# Altium PCB ShieldCerveaux.PCBDOC
Units mm, origin at the board's own origin, x right, y up, seen from the top; angles counter-clockwise.
Board outline 299.72 x 199.9 mm, 2 copper layers (Top Layer, Bottom Layer); 60 components, 39 nets, 263 pads, 60 vias.
Unrouted connection lines stored in the file: 1.
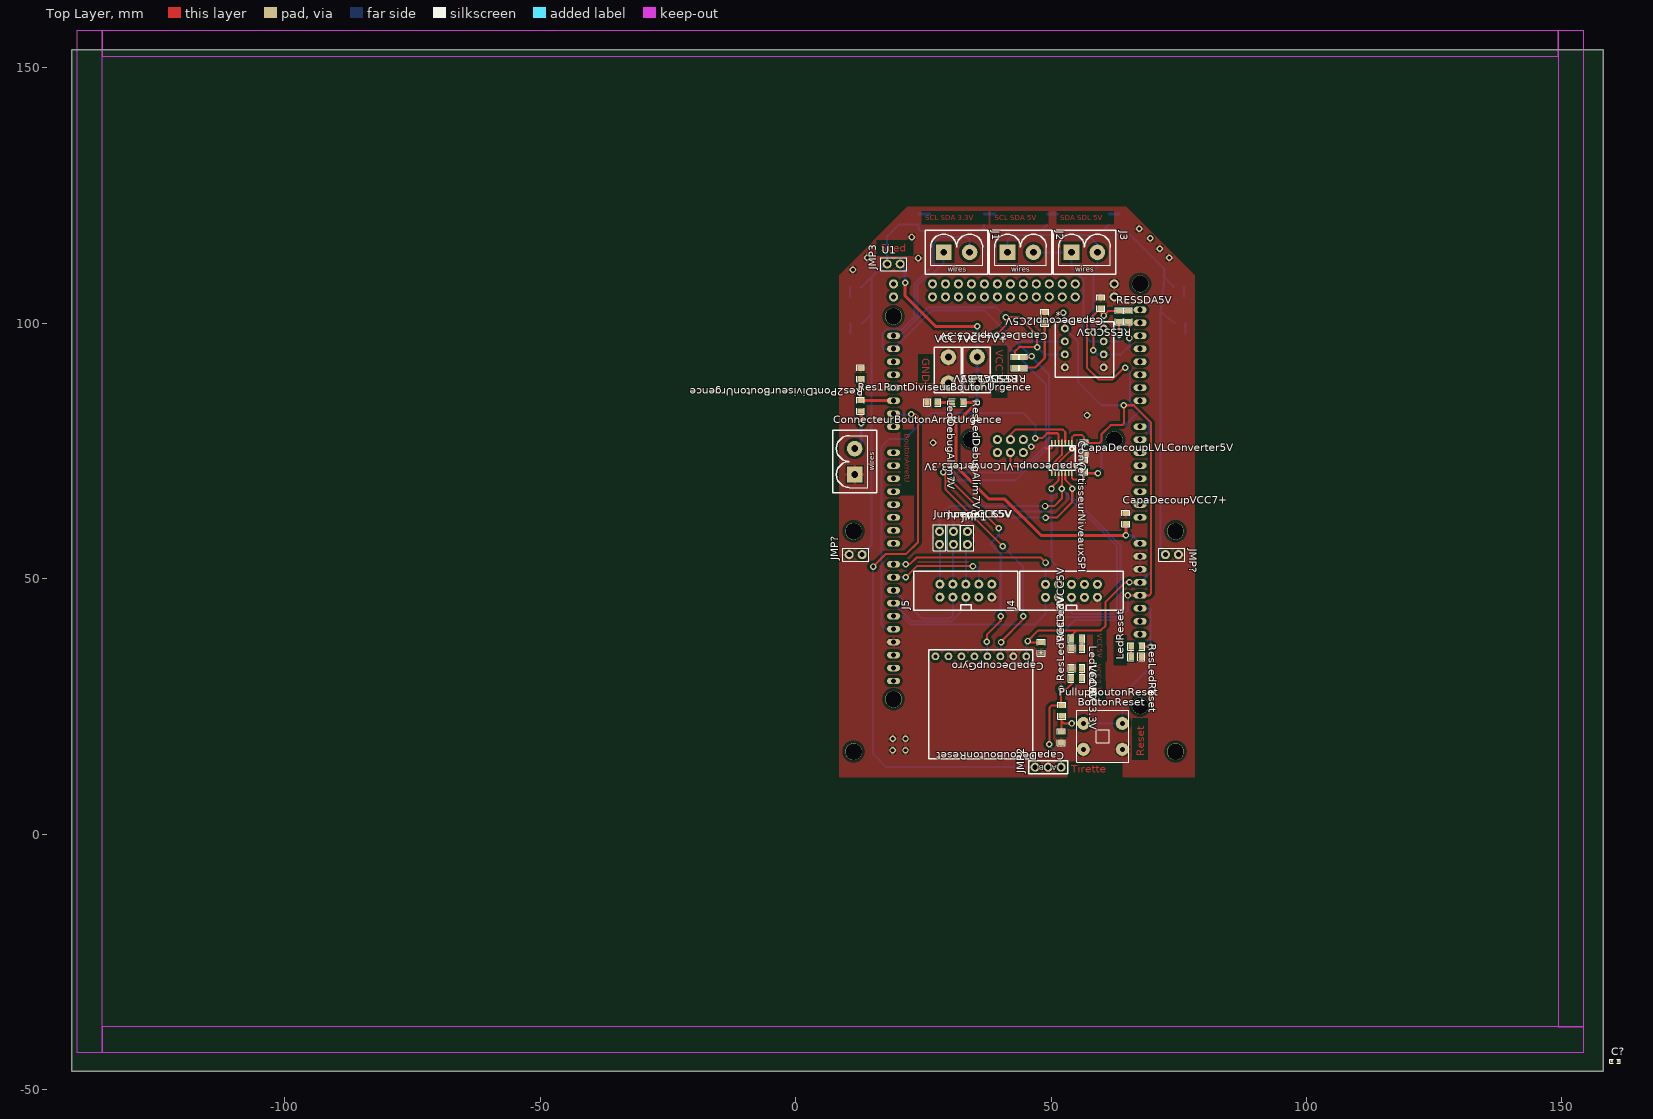
[diagram p0: Top Layer view]
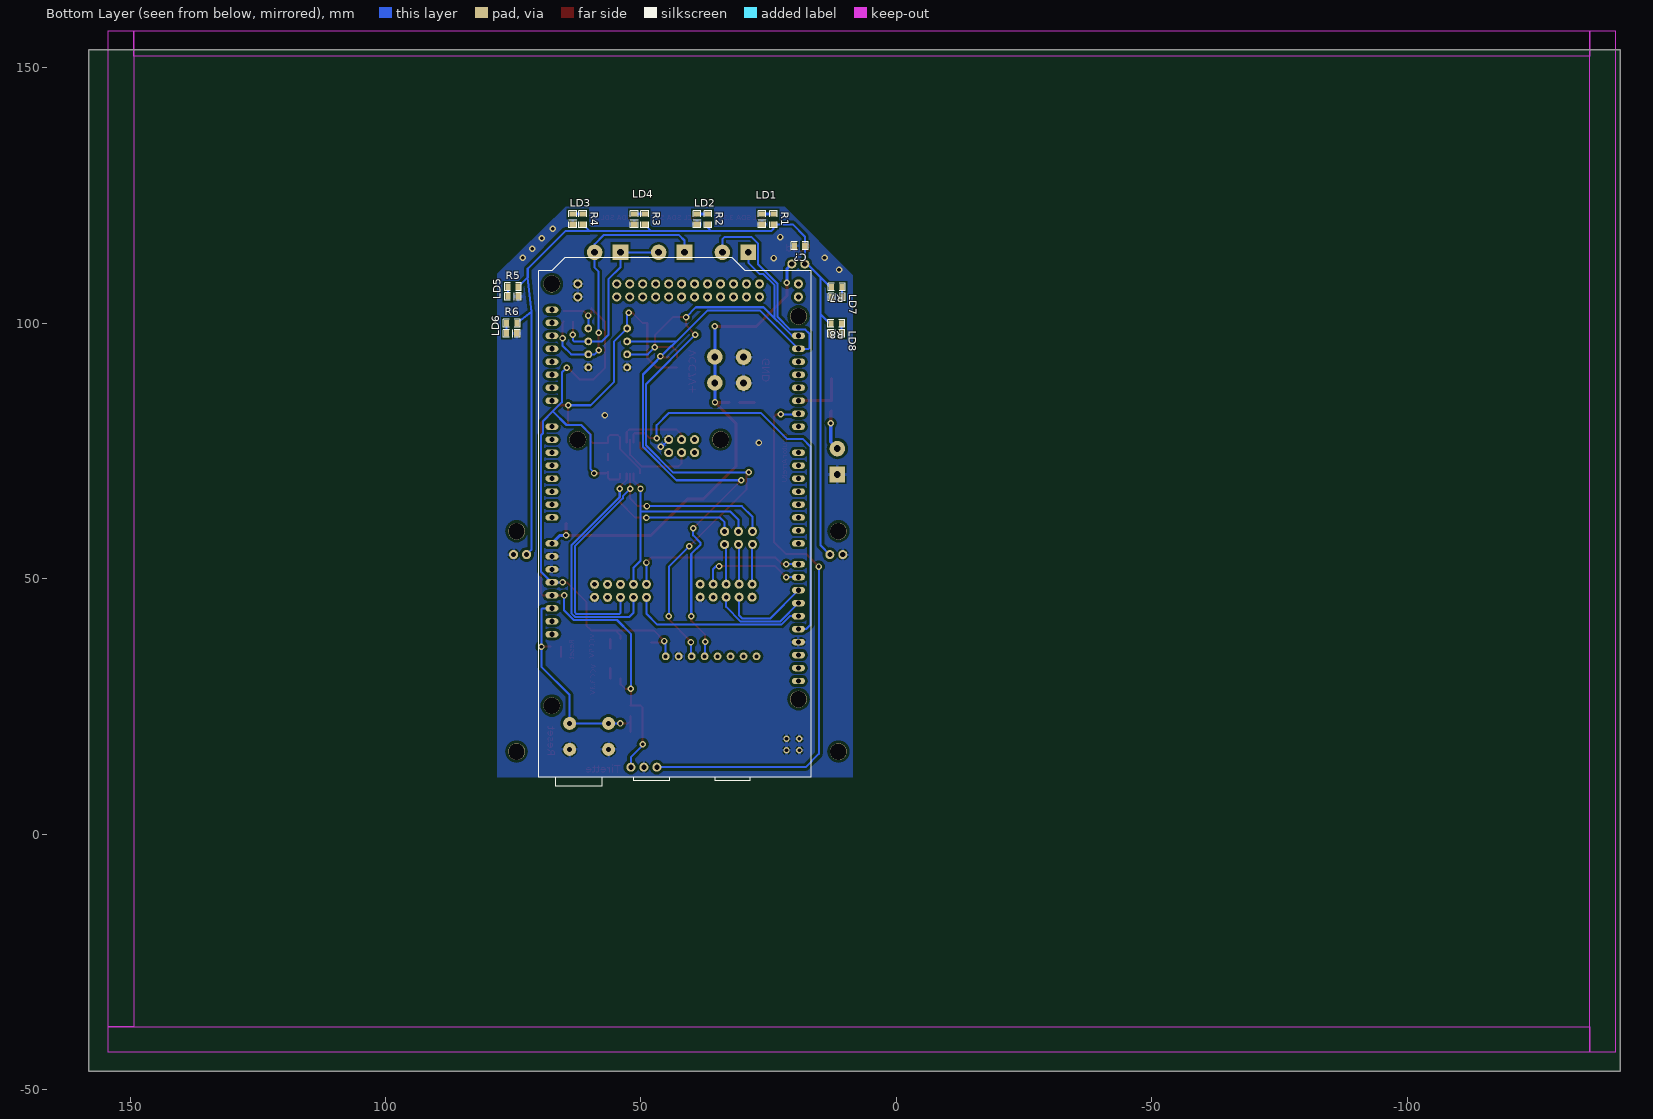
[diagram p1: Bottom Layer view, seen from below]

## Layer stack, top to bottom
Top Solder: solder mask 0.0102, Solder Resist, Dk 3.5
Top Layer: signal copper 0.0356
Dielectric1: dielectric 0.32, FR-4, Dk 4.8
Bottom Layer: signal copper 0.0356
Bottom Solder: solder mask 0.0102, Solder Resist, Dk 3.5

## Board outline
-141.655,-46.39 158.065,-46.39 158.065,153.508 -141.655,153.508

## Design rules (kind name [scope] priority, off if disabled: settings)
Clearance Clearance_bottom_polygon [OnLayer('Bottom Layer') Or OnLayer('Multi-Layer') vs OnLayer('Bottom Layer')  And  InPoly] p1: gap=0.508
Clearance Clearance_top_polygon [OnLayer('Top Layer')  Or OnLayer('Multi-Layer') vs OnLayer('Top Layer') And InPoly] p2: gap=0.508
Clearance Clearance_bottom [OnLayer('Bottom Layer') Or OnLayer('Multi-Layer') vs OnLayer('Bottom Layer')  And Not InPoly] p3: gap=0.203
Clearance Clearance_top [OnLayer('Top Layer')  Or OnLayer('Multi-Layer') vs OnLayer('Top Layer') And Not InPoly] p4: gap=0.203
Clearance Clearance_pad_to_pad [OnLayer('Multi-Layer') vs OnLayer('Multi-Layer')] p5: gap=0.254
ComponentClearance ComponentClearance_bottom [OnLayer('Bottom Overlay') vs OnLayer('Bottom Overlay')] p1: gap=0 collisioncheckmode=3 verticalgap=0.254 showdistances=FALSE
ComponentClearance ComponentClearance_top [OnLayer('Top Overlay') vs OnLayer('Top Overlay')] p2: gap=0 collisioncheckmode=3 verticalgap=0.254 showdistances=FALSE
FabricationTestPointUsage TestPointUsage [All] p1: valid=0 allowmultiple=FALSE
FabricationTestpoint Testpoint [All] p1: side=3 testpointundercomponent=TRUE minsize=1.016 maxsize=2.54 preferedsize=1.524 minholesize=0 maxholesize=1.016 preferedholesize=0.813 testpointgrid=0.025 allowsidetop=TRUE allowsidebottom=TRUE usegrid=TRUE gridtolerance=0
HoleSize [All] p1: absolutevalues=TRUE maxlimit=25.4 minlimit=0.406 maxpercent=80.000 minpercent=20.000
MinimumAnnularRing [PadXSize_AllLayers = PadYSize_AllLayers] p1: minimumring=0.254
PermittedLayers [All] p1: toplayerpermitted=TRUE bottomlayerpermitted=TRUE
PolygonConnect [All] p1: connectstyle=Relief reliefconductorwidth=0.61 reliefentries=4 polygonreliefangle="90 Angle" airgapwidth=0.254
RoutingVias [All] p1: holewidth=0.406 width=0.813 viastyle="Through Hole" minholewidth=0.4 minwidth=0.8 maxholewidth=0.6 maxwidth=10
SMDToPlane [All] p1: distance=0
SolderMaskExpansion [All] p1: expansion=0.102
ViasUnderSMD [All] p1: allowed=FALSE
Width Width_botom_top [OnLayer('Bottom Layer') or OnLayer('Top Layer')] p1: maxlimit=254 minlimit=0.254 preferedwidth=0.813 minimp=50.000000 maximp=50.000000 favimp=50.000000
26 further rules are at their usual default settings.

## Classes and differential pairs
component class ShematicShieldCerveau: * BoutonReset CapaDecouBoutonReset CapaDecoupGyro CapaDecoupI2C3.3V CapaDecoupI2C5V CapaDecoupLVLConverter3.3V CapaDecoupLVLConverter5V CapaDecoupVCC7+ ConnecteurBoutonArretUrgence ConvertisseurNiveauxSPI J1 J2 J3 J4 J5 JMP1 JMP2 JMP? JumperCS5V JumperSCLK5V LedDebugAlim7V LedReset LedVCC3.3V LedVCC5V PullupBoutonReset Res1PontDiviseurBoutonUrgence Res2PontDiviseurBoutonUrgence ResLedDebugAlim7V ResLedReset ResLedVCC3.3V ResLedVCC5V RESSCL3.3V RESSCL5V RESSDA3.3V RESSDA5V U1 VCC7V+ VCC7V-
component class Led: C? JMP3 LD1 LD2 LD3 LD4 LD5 LD6 LD7 LD8 R1 R2 R3 R4 R5 R6 R7 R8

## Components (designator, comment, footprint, x,y, rotation, side; value= is the part's Value field where it differs from the comment)
* "ConvertisseurDeNiveau" ConvertisseurDeniveauxI2C 52.705,98.984 r0 top
* "GyroscopeI2C" GyroscopeI2C 45.161,34.798 r270 top
BoutonReset "SW_PB" KSA 56.337,16.586 r90 top
C? "CAP" 0402 159.741,-44.434 r0 top
C? "CAP" 0805 17.932,115.138 r0 bottom
CapaDecouBoutonReset "CAP" 0805 52.019,20.015 r270 top
CapaDecoupGyro "CAP" 0805 48.057,37.516 r270 top
CapaDecoupI2C3.3V "CAP" 0805 48.768,102.108 r270 top
CapaDecoupI2C5V "CAP" 0805 59.715,104.978 r270 top
CapaDecoupLVLConverter3.3V "CAP" 0805 56.49,76.556 r270 top
CapaDecoupLVLConverter5V "CAP" 0805 56.439,71.018 r90 top
CapaDecoupVCC7+ "CAP" 0805 64.618,60.757 r90 top
ConnecteurBoutonArretUrgence "comment" AMP_2 11.557,70.383 r90 top
ConvertisseurNiveauxSPI "LvlConverter_Adg3304" LvlConverter_Adg3304 54.077,76.683 r270 top
J1 "I2CConntector=>MotorDue" AMP_2 28.981,113.868 r0 top
J2 "conntectorI2C=>ShieldRAMP" AMP_2 41.478,113.868 r0 top
J3 "conntectorI2C=>Sensor" AMP_2 54,113.868 r0 top
J4 "ConnectorDisplay" HE10-10V 48.92,46.355 r90 top
J5 "ConnectorEncoder" HE10-10V 28.245,46.38 r90 top
JMP1 "JUMPER2" JMP2-100 33.63,56.693 r90 top
JMP2 "JUMPER3" JMP3-100 51.968,13.106 r180 top
JMP3 "JUMPER2" JMP2-100 20.472,111.582 r180 top
JMP? "JUMPER2" JMP2-100 13.03,54.712 r180 top
JMP? "JUMPER2" JMP2-100 72.39,54.712 r0 top
JumperCS5V "JUMPER2" JMP2-100 30.912,56.718 r90 top
JumperSCLK5V "JUMPER2" JMP2-100 28.169,56.718 r90 top
LD1 "comment" LED0805 26.314,119.355 r90 bottom
LD2 "comment" LED0805 39.04,119.355 r90 bottom
LD3 "comment" LED0805 63.348,119.355 r90 bottom
LD4 "comment" LED0805 51.308,119.355 r90 bottom
LD5 "comment" LED0805 74.016,105.232 r0 bottom
LD6 "comment" LED0805 74.295,97.993 r0 bottom
LD7 "comment" LED0805 12.725,105.131 r180 bottom
LD8 "comment" LED0805 12.776,97.993 r180 bottom
LedDebugAlim7V "comment" LED0805 25.705,84.48 r0 top
LedReset "comment" LED0805 67.716,34.722 r180 top
LedVCC3.3V "comment" LED0805 53.975,32.487 r0 top
LedVCC5V "comment" LED0805 53.975,36.347 r0 top
PullupBoutonReset "RES" 0805 52.07,23.165 r90 top
R1 "RES" 0805 24.054,121.387 r270 bottom
R2 "RES" 0805 36.881,121.387 r270 bottom
R3 "RES" 0805 49.276,121.387 r270 bottom
R4 "RES" 0805 61.366,121.387 r270 bottom
R5 "RES" 0805 76.048,107.112 r180 bottom
R6 "RES" 0805 76.302,100 r180 bottom
R7 "RES" 0805 10.668,107.086 r0 bottom
R8 "RES" 0805 10.744,99.924 r0 bottom
Res1PontDiviseurBoutonUrgence "RES" 0805 12.725,82.829 r90 top
Res2PontDiviseurBoutonUrgence "RES" 0805 12.725,91.186 r270 top
ResLedDebugAlim7V "RES" 0805 30.709,84.48 r0 top
ResLedReset "RES" 0805 65.684,36.728 r0 top
ResLedVCC3.3V "RES" 0805 56.007,30.505 r180 top
ResLedVCC5V "RES" 0805 56.007,38.227 r180 top
RESSCL3.3V "RES" 0805 42.951,93.32 r270 top
RESSCL5V "RES" 0805 65.126,102.362 r270 top
RESSDA3.3V "RES" 0805 44.602,93.32 r270 top
RESSDA5V "RES" 0805 63.322,100.33 r90 top
U1 "ARDUINO_DUE" ARDUINO_DUE 69.977,11.176 r90 top
VCC7V+ "Connector_Cosse" Connector_Cosse 35.535,93.396 r0 top
VCC7V- "Connector_Cosse" Connector_Cosse 29.921,93.37 r0 top

## Footprints (in the part's own frame and the unit in brackets; to place one, negate y for a bottom-side part, rotate by r counter-clockwise, add the part's x,y. Pads: shape width x height; smd on the part's side, far side on the other; paste and mask are expansions set on the pad)
0402 [mil]
  rect 20x20 smd: 1(0,0) 2(51.18,0)
  silkscreen extent -15,-15 65,15
0805 [mil]
  rect 40x50 smd: 1(0,0) 2(80,0)
  silkscreen extent -25,-30 105,30
AMP_2 [mil]
  rect 120x120 hole 52: 1(0,0)
  round 120 hole 52: 2(200,0)
  silkscreen extent -140,-170 340,170
ARDUINO_DUE [mil]
  oval 50x100 hole 40: 1(740,2000) 2(840,2000) 3(940,2000) 4(1040,2000) 5(1140,2000) 6(1240,2000) 7(1340,2000) 8(1440,2000) 9(1540,2000) 10(1640,2000) 11(1800,2000) 12(1900,2000) 13(2000,2000) 14(2100,2000) 15(2200,2000) 16(2300,2000) 17(2400,2000) 18(2500,2000) 19(2700,2000) 20(2800,2000) 21(2900,2000) 22(3000,2000) 23(3100,2000) 24(3200,2000) 25(3300,2000) 26(3400,2000) 63(3600,100) 64(3500,100) 65(3400,100) 66(3300,100) 67(3200,100) 68(3100,100) 69(3000,100) 70(2900,100) 71(2700,100) 72(2600,100) 73(2500,100) 74(2400,100) 75(2300,100) 76(2200,100) 77(2100,100) 78(2000,100) 79(1800,100) 80(1700,100) 81(1600,100) 82(1500,100) 83(1400,100) 84(1300,100) 85(1200,100) 86(1100,100)
  round 70 hole 40: 27(3700,2000) 28(3800,2000) 33(3700,1700) 34(3800,1700) 35(3700,1600) 36(3800,1600) 37(3700,1500) 38(3800,1500) 39(3700,1400) 40(3800,1400) 41(3700,1300) 42(3800,1300) 43(3700,1200) 44(3800,1200) 45(3700,1100) 46(3800,1100) 47(3700,1000) 48(3800,1000) 49(3700,900) 50(3800,900) 51(3700,800) 52(3800,800) 53(3700,700) 54(3800,700) 55(3700,600) 56(3800,600) 61(3700,300) 62(3800,300) 87(2500,1200) 88(2600,1200) 89(2500,1100) 90(2600,1100) 91(2500,1000) 92(2600,1000)
  round 0 all layers, no hole: 29(3700,1900) 30(3800,1900) 31(3700,1800) 32(3800,1800) 57(3700,500) 58(3800,500) 59(3700,400) 60(3800,400)
  round 130 hole 126: ""(550,100) ""(600,2000) ""(2600,300) ""(2600,1400) ""(3550,2000) ""(3800,100)
Connector_Cosse [mil]
  round 120 hole 52.01: 1(0,-200) 1(0,0)
  silkscreen extent -110,-275 100,75
ConvertisseurDeniveauxI2C [mil]
  round 60 hole 30: 1(0,0) 2(0,-100) 3(0,-200) 4(0,-300) 5(299.21,-300) 6(299.21,-200) 7(299.21,-100) 8(299.21,0)
  silkscreen extent -75,-375 375,50
GyroscopeI2C [mil]
  round 60 hole 30: 1(0,0) 2(0,-100) 3(0,-200) 4(0,-300) 5(0,-400) 6(0,-500) 7(0,-600) 8(0,-700)
  silkscreen extent -50,-750 790,50
HE10-10V [mil]
  round 70 hole 36: 1(0,0) 2(100,0) 3(0,-100) 4(100,-100) 5(0,-200) 6(100,-200) 7(0,-300) 8(100,-300) 9(0,-400) 10(100,-400)
  silkscreen extent -100,-600 200,200
JMP2-100 [mil]
  round 70 hole 40: 1(0,0) 2(100,0)
  silkscreen extent -50,-50 150,50
JMP3-100 [mil]
  round 70 hole 40: 1(0,0) 2(200,0) 3(100,0)
  silkscreen extent -50,-50 250,50
KSA [mil]
  round 100 hole 40: 1(200,-300) 2(200,0) 3(0,0) 4(0,-300)
  silkscreen extent -100,-350 300,50
LED0805 [mil]
  rect 40x50 smd: A(80,0) K(0,0)
  silkscreen extent -25,-30 105,30
LvlConverter_Adg3304 [mm]
  rect 1x0.3 smd: 1(0,0) 2(0,-0.65) 3(0,-1.3) 4(0,-1.95) 5(0,-2.6) 6(0,-3.25) 7(0,-3.9) 8(6.1,-3.9) 9(6.1,-3.25) 10(6.1,-2.6) 11(6.1,-1.95) 12(6.1,-1.3) 13(6.1,-0.65) 14(6.1,0)
  silkscreen extent 0.63,-4.44 5.46,0.64

## Part data
C? C? CapaDecouBoutonReset CapaDecoupGyro CapaDecoupI2C3.3V CapaDecoupI2C5V CapaDecoupLVLConverter3.3V CapaDecoupLVLConverter5V CapaDecoupVCC7+: "capacité non polarisée"
ConnecteurBoutonArretUrgence J1 J2 J3: library part POWER2, "connecteur alim 2 pôles"
J4 J5: library part HE10-10, "10-pin connector"
JMP1 JMP3 JMP? JMP? JumperCS5V JumperSCLK5V: "cavalier 1 position"
JMP2: "cavalier 2 positions"
LD1 LD2 LD3 LD4 LD5 LD6 LD7 LD8 LedDebugAlim7V LedReset LedVCC3.3V LedVCC5V: library part LED, "LED 5mm/3mm/CMS"
PullupBoutonReset R1 R2 R3 R4 R5 R6 R7 R8 Res1PontDiviseurBoutonUrgence Res2PontDiviseurBoutonUrgence ResLedDebugAlim7V ResLedReset ResLedVCC3.3V ResLedVCC5V RESSCL3.3V RESSCL5V RESSDA3.3V RESSDA5V: "resistance"

## Free pads (board coordinates)
  round 3.303 hole 3.2: 0(11.354,16.153) 0(11.354,59.284) 0(74.346,16.153) 0(74.346,59.284)

## Via types
v1: diameter 1.27, hole 0.711, Top Layer to Bottom Layer, 60 vias

## Nets (pads, with @x,y where several pads share a name; then routed paths per layer and width w, separated by ;. In a path a pad name is that pad's centre, name@x,y a point inside that pad or via, vN(x,y) a via of type N, cw(c..) or ccw(c..) an arc to the next point about the centre after c; other vN are vias at no path point)
BEEP: J4.1 U1.6 | length 34.6
  Bottom Layer w0.4: U1.6 20.864,42.672 22.534,41.002 46.819,41.002 48.92,43.104 J4.1
BOUTONARRET+: ConnecteurBoutonArretUrgence.2 Res1PontDiviseurBoutonUrgence.1 | length 8
  Top Layer w0.6: Res1PontDiviseurBoutonUrgence.1 12.852,82.702 v1(12.852,80.391)
  Bottom Layer w0.6: ConnecteurBoutonArretUrgence.2 12.852,76.759 v1(12.852,80.391)
CS3.3V: ConvertisseurNiveauxSPI.5 U1.5 | length 80.5
  Top Layer w0.4: v1(46.939,77.495) 48.285,77.495 49.251,78.461 51.257,78.461 51.477,78.241 ConvertisseurNiveauxSPI.5
  Bottom Layer w0.4: U1.5 17.704,40.132 16.815,41.021 16.815,75.819 18.364,77.368 21.438,77.368 26.467,82.398 44.602,82.398 46.939,80.061 v1(46.939,77.495)
CS5V: ConvertisseurNiveauxSPI.10 J4.4 JumperCS5V.2 | length 45.1
  Top Layer w0.4: v1(50.089,67.589) 50.089,67.691 49.987,67.793 51.477,69.282 ConvertisseurNiveauxSPI.10
  Bottom Layer w0.4: JumperCS5V.2 30.912,61.57 32.487,63.144 50.089,63.144 ; v1(50.089,67.589) 50.089,63.144 ; J4.4 51.46,52.146 50.089,53.518 50.089,63.144
CS5VOUT: J5.4 JumperCS5V.1 | length 7.9
  Bottom Layer w0.4: J5.4 30.785,56.591 JumperCS5V.1
DATABOUTONURGENCE: Res1PontDiviseurBoutonUrgence.2 Res2PontDiviseurBoutonUrgence.2 U1.21 | length 10.8
  Top Layer w0.6: Res2PontDiviseurBoutonUrgence.2 Res1PontDiviseurBoutonUrgence.2 12.751,84.836 U1.21
ENBT1: J5.5 U1.7 | length 18.7
  Bottom Layer w0.4: U1.7 22.784,41.605 30.455,41.605 33.325,44.475 J5.5
ENBT2: J5.3 U1.8 | length 17.7
  Bottom Layer w0.4: U1.8 24.721,42.208 30.205,42.208 30.785,42.788 J5.3
ENS: J4.2 U1.10 | length 35
  Top Layer w0.4: v1(21.565,52.832) 22.377,52.832 23.698,54.153 47.955,54.153 48.92,53.188 v1(48.92,53.162)
  Bottom Layer w0.4: U1.10 v1(21.565,52.832) ; J4.2 v1(48.92,53.162)
GND: *.2@42.621,34.798 *.4@52.705,91.364 *.5@60.305,91.364 BoutonReset.3 BoutonReset.4 C?.2@19.964,115.138 CapaDecouBoutonReset.2 CapaDecoupGyro.2 CapaDecoupI2C3.3V.1 CapaDecoupI2C5V.1 CapaDecoupLVLConverter3.3V.2 CapaDecoupLVLConverter5V.2 CapaDecoupVCC7+.2 ConnecteurBoutonArretUrgence.1 ConvertisseurNiveauxSPI.7 J4.9 J5.9 JMP2.3 JMP?.2 LD1.K LD2.K LD3.K LD4.K LD5.K LD6.K LD7.K LD8.K LedDebugAlim7V.K LedReset.K LedVCC3.3V.K LedVCC5V.K Res2PontDiviseurBoutonUrgence.1 U1.4 U1.61 U1.62 U1.80 U1.81 U1.92 VCC7V-.1 | length 6
  Top Layer w0.4: 48.92,75.59 49,75.511 50.111,75.511 50.177,75.577 ConvertisseurNiveauxSPI.7 ; CapaDecoupLVLConverter5V.2@56.49,73.101 CapaDecoupLVLConverter3.3V.2
  Bottom Layer w0.4: U1.92 45.974,75.819 v1(46.152,75.819)
  other v1: 18.974,16.383 21.514,16.383 18.999,18.669 21.514,18.669 26.899,76.632 57.048,81.991 11.227,110.439 24.028,112.751 73.127,112.776 14.072,112.827 71.247,114.579 69.444,116.611 22.733,116.865 67.234,118.466
NetLD1_A: LD1.A R1.1 | length 2.3
  Bottom Layer w0.6: R1.1 LD1.A
NetLD2_A: LD2.A R2.1 | length 2.2
  Bottom Layer w0.6: R2.1 LD2.A
NetLD3_A: LD3.A R4.1 | length 2
  Bottom Layer w0.6: R4.1 LD3.A
NetLD4_A: LD4.A R3.1 | length 2
  Bottom Layer w0.6: R3.1 LD4.A
NetLD5_A: LD5.A R5.1 | length 1.9
  Bottom Layer w0.4: LD5.A R5.1
NetLD6_A: LD6.A R6.1 | length 2
  Bottom Layer w0.4: R6.1 76.302,98.019 LD6.A
NetLD7_A: LD7.A R7.1 | length 2
  Bottom Layer w0.4: R7.1 10.668,105.156 LD7.A
NetLD8_A: LD8.A R8.1 | length 1.9
  Bottom Layer w0.4: LD8.A R8.1
NetLedDebugAlim7V_A: LedDebugAlim7V.A ResLedDebugAlim7V.1 | length 3
  Top Layer w0.6: LedDebugAlim7V.A ResLedDebugAlim7V.1
NetLedReset_A: LedReset.A ResLedReset.1 | length 2
  Top Layer w0.4: LedReset.A ResLedReset.1
NetLedVCC3.3V_A: LedVCC3.3V.A ResLedVCC3.3V.1 | length 2
  Top Layer w0.4: ResLedVCC3.3V.1 LedVCC3.3V.A
NetLedVCC5V_A: LedVCC5V.A ResLedVCC5V.1 | length 1.9
  Top Layer w0.4: LedVCC5V.A ResLedVCC5V.1
RESET: BoutonReset.1 BoutonReset.2 CapaDecouBoutonReset.1 PullupBoutonReset.1 ResLedReset.2 U1.84 | length 43.8
  Top Layer w0.4: CapaDecouBoutonReset.1 52.07,20.066 52.07,22.123 ; PullupBoutonReset.1 52.07,22.123 ; v1(54.077,21.666) 52.527,21.666 52.07,22.123 ; ResLedReset.2 67.742,36.703 v1(69.469,36.703)
  Bottom Layer w0.4: v1(54.077,21.666) BoutonReset.2 BoutonReset.1 63.957,27.229 69.494,32.766 69.494,44.018 69.317,44.196 U1.84
SCL3.3V: *.3 J1.1 RESSCL3.3V.1 U1.26 | length 158.9
  Top Layer w0.4: v1(28.88,70.815) 29.315,70.38 29.315,67.535 v1(40.538,56.312) ; v1(39.345,97.765) 41.173,99.593 v1(41.173,101.194) 43.739,101.194 47.269,97.663 v1(47.269,95.301) 43.764,95.301 42.951,94.488 RESSCL3.3V.1 ; v1(40.208,37.592) 40.208,37.694 44.552,42.037 v1(44.552,42.672)
  Bottom Layer w0.254: U1.26@19.177,97.511 U1.26@20.396,97.511
  Bottom Layer w0.4: U1.26@20.396,97.511 26.01,103.124 39.243,103.124 v1(41.173,101.194) ; 23.851,100.965 23.851,107.43 26.012,109.591 26.737,109.591 28.981,111.836 J1.1 ; v1(28.88,70.815) 43.749,70.815 49.003,76.069 49.003,82.379 49.022,82.398 49.022,88.087 v1(39.345,97.765) ; *.3@40.081,34.798 40.208,34.925 v1(40.208,37.592) ; v1(40.538,56.312) 44.552,52.299 v1(44.552,42.672) ; v1(47.269,95.301) 48.666,93.904 *.3@52.705,93.904
SCL5V: *.6@60.305,93.904 J2.1 J3.2 RESSCL5V.2 | length 55.2
  Top Layer w0.4: v1(58.268,94.717) 58.293,94.742 v1(58.293,98.11) ; RESSCL5V.2 65.354,100.101 v1(65.354,97.028)
  Bottom Layer w0.4: J2.1 41.478,116.18 42.545,117.246 57.328,117.246 59.08,115.494 J3.2 59.08,110.871 58.293,110.084 v1(58.293,98.11) ; v1(58.268,94.717) 59.08,93.904 60.305,93.904 63.678,93.904 65.354,95.58 v1(65.354,97.028)
SCLK3.3V: ConvertisseurNiveauxSPI.4 U1.89 | length 16.4
  Top Layer w0.4: U1.89 42.037,72.593 42.672,71.958 49.835,71.958 52.127,74.25 ConvertisseurNiveauxSPI.4 52.127,77.222 52.121,77.228
SCLK5V: ConvertisseurNiveauxSPI.11 J4.5 JumperSCLK5V.2 | length 74
  Top Layer w0.4: v1(48.819,64.211) 50.648,64.211 52.121,65.684 v1(52.121,67.589) 52.127,67.595 ConvertisseurNiveauxSPI.11
  Bottom Layer w0.4: JumperSCLK5V.2 28.169,62.103 30.277,64.211 v1(48.819,64.211) ; v1(52.121,67.589) 53.55,66.161 53.55,65.739 62.948,56.341 62.948,43.404 62.666,43.123 54.185,43.123 54,43.307 J4.5
SCLK5VOUT: J5.2 JumperSCLK5V.1 | length 7.8
  Bottom Layer w0.4: JumperSCLK5V.1 28.245,56.642 J5.2
SDA3.3V: *.2@52.705,96.444 *.4@37.541,34.798 J1.2 RESSDA3.3V.1 U1.25 | length 166.1
  Top Layer w0.4: v1(30.353,69.266) v1(39.776,59.842) ; v1(37.44,37.668) 37.44,39.014 40.157,41.732 v1(40.157,42.647) ; RESSDA3.3V.1@44.552,93.421 44.526,93.396 RESSDA3.3V.1 45.999,93.32 v1(46.177,93.497)
  Bottom Layer w0.4: U1.25@19.177,94.971 26.727,102.521 36.951,102.521 43.028,96.444 ; U1.25 17.17,94.996 17.043,95.123 17.043,97.993 17.805,98.755 20.788,98.755 23.247,101.215 23.247,107.68 27.054,111.487 27.054,115.559 28.411,116.916 33.579,116.916 34.061,116.434 J1.2 ; v1(30.353,69.266) 43.053,69.266 49.606,75.819 49.606,82.129 49.625,82.148 49.625,88.337 49.606,88.356 49.606,89.967 44.018,95.555 43.917,95.555 43.028,96.444 ; v1(37.44,37.668) 37.44,34.9 *.4@37.541,34.798 ; v1(39.776,59.842) 39.776,58.471 38.354,57.048 38.354,56.667 40.157,54.864 v1(40.157,42.647) ; *.2@52.705,96.444 43.028,96.444
SDA5V: *.7@60.305,96.444 J2.2 J3.1 RESSDA5V.1 | length 35.8
  Top Layer w0.4: v1(63.322,97.739) RESSDA5V.1
  Bottom Layer w0.4: J2.2 J3.1 54,110.973 56.388,108.585 56.388,97.688 57.633,96.444 60.305,96.444 63.119,96.444 63.322,96.647 v1(63.322,97.739)
SID3.3V(MOSI): ConvertisseurNiveauxSPI.3 U1.90 | length 14.3
  Top Layer w0.4: U1.90 42.037,78.181 43.028,79.172 52.324,79.172 52.777,78.719 ConvertisseurNiveauxSPI.3
SID5V(MOSI): ConvertisseurNiveauxSPI.12 J4.3 JMP1.2 | length 74.2
  Top Layer w0.4: v1(48.92,61.951) 51.105,61.951 54.153,64.999 v1(54.153,67.589) 54.153,68.021 52.777,69.397 ConvertisseurNiveauxSPI.12
  Bottom Layer w0.4: JMP1.2 33.63,61.036 34.569,61.976 48.895,61.976 v1(48.92,61.951) ; J4.3 51.46,43.307 52.248,42.52 62.916,42.52 63.551,43.155 63.551,56.591 54.153,65.989 v1(54.153,67.589)
SID5VOUT(MOSI): J5.6 JMP1.1 | length 7.9
  Bottom Layer w0.4: J5.6 33.325,56.388 JMP1.1
SWECRAN: J5.8 U1.9 | length 20.5
  Top Layer w0.4: v1(21.565,50.267) 23.749,52.451 v1(34.722,52.451)
  Bottom Layer w0.4: U1.9 v1@21.209,50.292 ; v1(21.565,50.267) 21.59,50.267 v1@21.615,50.292 ; v1(34.722,52.451) 35.306,52.451 35.865,51.892 J5.8
TIRETTE: JMP2.2 U1.20 | length 110
  Top Layer w0.4: v1(15.189,52.375) 17.602,54.788 21.59,54.788 23.952,57.15 23.952,81.686 23.47,82.169 v1(22.657,82.169)
  Bottom Layer w0.4: v1@15.164,52.603 15.164,15.697 17.755,13.106 JMP2.2 ; U1.20 19.304,82.169 v1(22.657,82.169)
VCC3.3V: *.1@52.705,98.984 CapaDecoupI2C3.3V.2 CapaDecoupLVLConverter3.3V.1 ConvertisseurNiveauxSPI.1 ConvertisseurNiveauxSPI.8 JMP2.1 PullupBoutonReset.2 ResLedVCC3.3V.2 RESSCL3.3V.2 RESSDA3.3V.2 U1.83 | length 165.9
  Top Layer w0.4: RESSCL3.3V.2 RESSDA3.3V.2 46.863,91.288 48.768,93.193 CapaDecoupI2C3.3V.2 49.708,100.076 51.689,102.057 v1(52.4,102.057) ; v1(49.657,17.628) 49.657,24.74 50.114,25.197 PullupBoutonReset.2 51.968,25.298 v1(51.968,28.423) 53.061,28.423 53.975,29.337 ResLedVCC3.3V.2 ; ConvertisseurNiveauxSPI.8 50.177,71.447 54.077,75.347 ConvertisseurNiveauxSPI.1 54.077,77.673 54.508,78.105 56.083,78.105 56.49,77.699 CapaDecoupLVLConverter3.3V.1 59.461,76.556 59.919,77.013 59.919,78.308 61.671,80.061 63.932,80.061 64.262,80.391 v1(64.262,83.947) 66.192,83.947 69.596,80.543 69.596,47.117 69.19,46.711 v1(65.024,46.711)
  Bottom Layer w0.4: v1(49.657,17.628) 49.657,17.399 51.968,15.088 JMP2.1 ; v1(51.968,28.423) 51.968,39.192 54.693,41.916 63.166,41.916 65.024,43.775 v1(65.024,46.711) ; v1(52.4,102.057) 52.705,101.752 52.705,98.984 55.245,96.444 55.245,88.544 59.842,83.947 v1(64.262,83.947) v1@64.262,84.404
VCC5V: *.1@45.161,34.798 *.8@60.305,98.984 CapaDecoupGyro.1 CapaDecoupI2C5V.2 CapaDecoupLVLConverter5V.1 ConvertisseurNiveauxSPI.14 J4.10 ResLedVCC5V.2 RESSCL5V.1 RESSDA5V.2 U1.82 | length 138.4
  Top Layer w0.4: CapaDecoupGyro.1 45.72,37.516 v1(45.441,37.795) 47.523,39.878 55.016,39.878 ; ResLedVCC5V.2 53.975,38.837 55.016,39.878 ; ConvertisseurNiveauxSPI.14 54.077,69.698 54.331,69.444 56.159,69.444 56.439,69.723 CapaDecoupLVLConverter5V.1 56.82,70.637 v1(59.182,70.637) ; v1(64.541,91.288) 64.287,91.288 62.027,89.027 59.284,89.027 56.998,91.313 56.998,100.228 CapaDecoupI2C5V.2 59.715,102.093 v1(60.305,101.504) 61.163,102.362 RESSDA5V.2 RESSCL5V.1 ; v1(65.354,49.276) 64.491,49.276 60.681,45.466 60.681,40.792 59.766,39.878 55.016,39.878
  Bottom Layer w0.4: *.1@45.161,34.798 45.161,37.516 v1(45.441,37.795) ; v1@59.36,70.968 59.842,71.45 59.842,78.207 61.722,80.086 64.567,80.086 67.247,82.766 ; *.8@60.305,98.984 v1(60.305,101.504) ; v1(64.541,91.288) 65.481,90.348 65.481,84.531 67.247,82.766 ; v1(65.354,49.276) U1.82 ; U1.82@67.437,49.251 69.596,51.41 69.596,78.014 69.171,78.439 69.171,80.842 67.247,82.766
VCC7V+: CapaDecoupVCC7+.1 JMP3.1 ResLedDebugAlim7V.2 U1.79 VCC7V+.1 | length 99.4
  Top Layer w0.6: v1(21.438,107.899) 21.438,105.334 27.381,99.39 v1(35.535,99.39) ; ResLedDebugAlim7V.2 32.766,84.506 v1(35.509,84.506) 31.42,80.416 31.42,71.958 37.744,65.634 40.869,65.634 48.031,58.471 v1(64.668,58.471) 64.668,60.706 CapaDecoupVCC7+.1
  Bottom Layer w0.6: JMP3.1 21.438,110.617 v1(21.438,107.899) ; v1@35.535,84.785 35.535,88.316 35.535,93.396 v1(35.535,99.39) ; v1(64.668,58.471) 65.862,58.471 U1.79
VCC7V+_1: C?.1@17.932,115.138 JMP3.2 JMP?.1 R1.2 R2.2 R3.2 R4.2 R5.2 R6.2 R7.2 R8.2 | length 197.6
  Bottom Layer w0.4: R7.2 12.954,107.086 14.859,108.991 ; R8.2 13.005,99.924 14.859,101.778 ; JMP?.1@13.03,54.712 14.859,56.54 14.859,101.778 ; R2.2 36.881,118.669 36.246,118.034 ; R3.2 47.955,118.034 ; R4.2 60.046,118.034 ; JMP?.1@72.39,54.712 71.45,55.651 71.45,102.21 ; R5.2 72.161,108.966 ; R6.2 71.45,102.21 ; 14.859,101.778 14.859,108.991 ; 14.859,108.991 17.45,111.582 JMP3.2 17.932,116.967 20.32,119.355 R1.2 24.054,118.491 24.511,118.034 36.246,118.034 ; 36.246,118.034 47.955,118.034 ; 47.955,118.034 60.046,118.034 ; 60.046,118.034 64.795,118.034 72.161,110.668 72.161,108.966 ; 71.45,102.21 72.161,108.966
pads on no net: *.5@35.001,34.798 *.6@32.461,34.798 *.7@29.921,34.798 *.8@27.381,34.798 C?.1@159.741,-44.434 C?.2@161.041,-44.434 ConvertisseurNiveauxSPI.2 ConvertisseurNiveauxSPI.6 ConvertisseurNiveauxSPI.9 ConvertisseurNiveauxSPI.13 J4.6 J4.7 J4.8 J5.1 J5.7 J5.10 U1. U1.1 U1.2 U1.3 U1.11 U1.12 U1.13 U1.14 U1.15 U1.16 U1.17 U1.18 U1.19 U1.22 U1.23 U1.24 U1.27 U1.28 U1.29 U1.30 U1.31 U1.32 U1.33 U1.34 U1.35 U1.36 U1.37 U1.38 U1.39 U1.40 U1.41 U1.42 U1.43 U1.44 U1.45 U1.46 U1.47 U1.48 U1.49 U1.50 U1.51 U1.52 U1.53 U1.54 U1.55 U1.56 U1.57 U1.58 U1.59 U1.60 U1.63 U1.64 U1.65 U1.66 U1.67 U1.68 U1.69 U1.70 U1.71 U1.72 U1.73 U1.74 U1.75 U1.76 U1.77 U1.78 U1.85 U1.86 U1.87 U1.88 U1.91

## Polygon pours and split planes (outlines as drawn)
GND on Top Layer "Mechanical 1-No Net" (solid, pour order 4): 78.105,109.398 64.745,122.758 21.844,122.758 8.509,109.423 8.509,11.176 78.105,11.176
GND on Bottom Layer "Mechanical 1-No Net" (solid, pour order 6): 64.745,122.758 21.844,122.758 8.509,109.423 8.509,11.176 78.105,11.176 78.105,109.449 78.232,109.576

## Keep-outs
Keep-Out Layer:
  rectangle: -140.695,-42.73 -135.695,157.27
  rectangle: -135.695,-42.73 154.305,-37.73
  rectangle: 149.305,-37.73 154.305,157.27
  rectangle: -135.695,152.27 149.305,157.27

## Other copper
Top Layer:
  text "SCL SDA 3.3V" at 25.425,120.117 h1
  text "SCL SDA 5V" at 38.989,120.117 h1
  text "SDA SDL 5V" at 51.841,120.117 h1
  text "SLed" at 16.688,113.944 h1.52
  text "VCC7V+" at 39.167,94.844 h1.52 r270
  text "GND" at 24.816,93.142 h1.52 r270
  text "BoutonArretU" at 21.336,78.41 h1 r270
  text "VCC5V" at 59.055,39.243 h1 r270.82
  text "Reset" at 63.017,38.125 h1 r270
  text "VCC3.3V" at 58.852,33.299 h1 r270.76
  text "Reset" at 68.199,15.291 h1.52 r90
  text "Tirette" at 53.924,11.989 h1.52

## Silkscreen, mask and mechanical layers (free items; w line width, h text height)
Top Overlay:
  text "Les bandes en violet delimitent la surface utilisable...." at -144.907,179.832 h6.35
  text "Mais vous n'etes pas obliges de tout utiliser!!" at -128.651,169.545 h6.35
Mechanical 1:
  lines w0.254: 8.509,11.176 8.509,107.668 8.509,109.423 21.844,122.758 64.745,122.758 78.105,109.398 78.105,11.176 8.509,11.176

## Text inside footprints (layer, text, board x,y; h text height)
ConnecteurBoutonArretUrgence: Top Overlay "wires" at 15.367,71.145 h1 r90
J1: Top Overlay "wires" at 29.743,110.058 h1
J2: Top Overlay "wires" at 42.24,110.058 h1
J3: Top Overlay "wires" at 54.762,110.058 h1
JMP2: Top Overlay "B" at 48.539,13.487 h1.02 r180; Top Overlay "A" at 51.079,13.487 h1.02 r180